# Altium PCB Arbolito.PcbDoc
Units mil, origin at the board's own origin, x right, y up, seen from the top; angles counter-clockwise.
Board outline 6050 x 2250 mil, 2 copper layers (Top Layer, Bottom Layer); 44 components, 53 nets, 146 pads, 20 vias.
Unrouted connection lines stored in the file: 1.
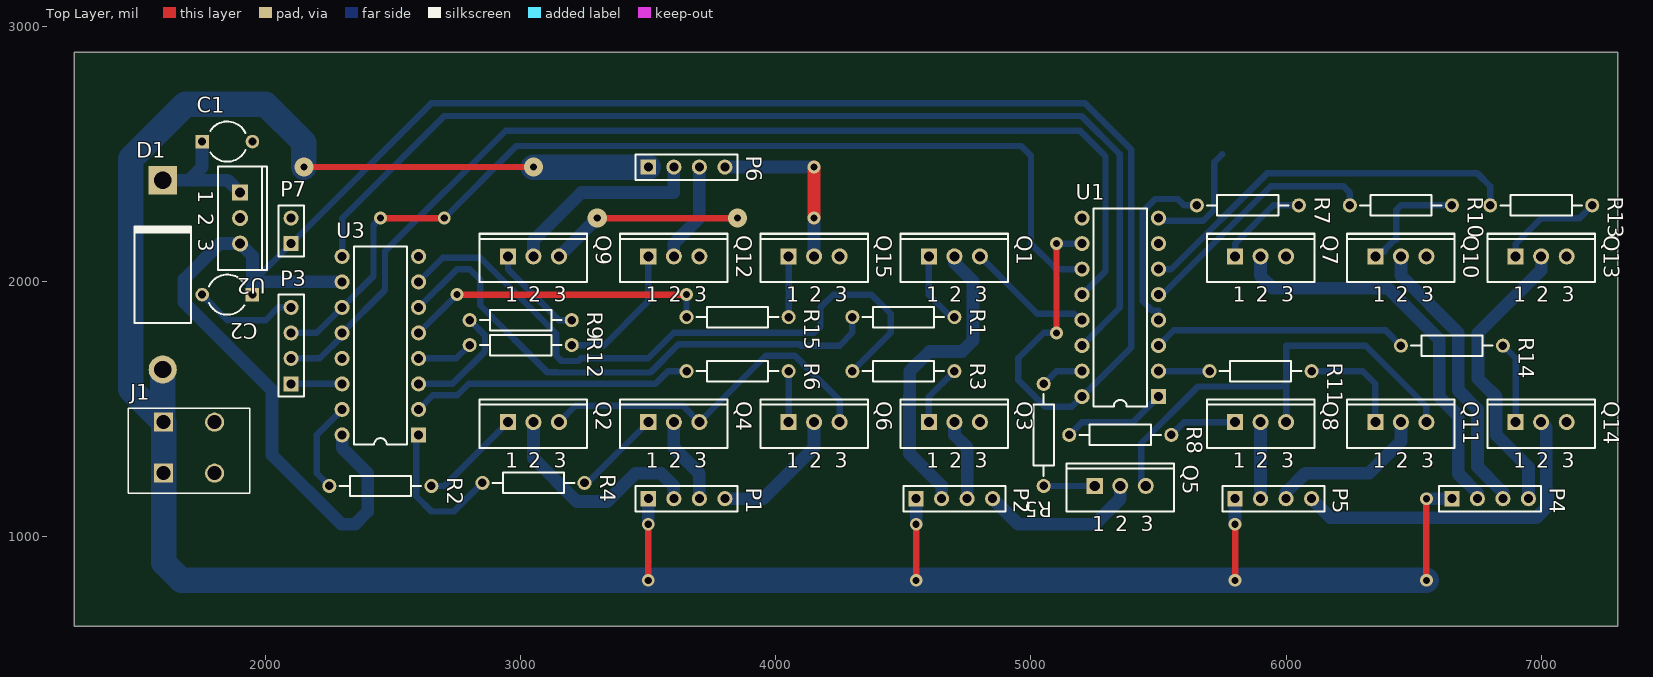
[diagram p0: Top Layer view]
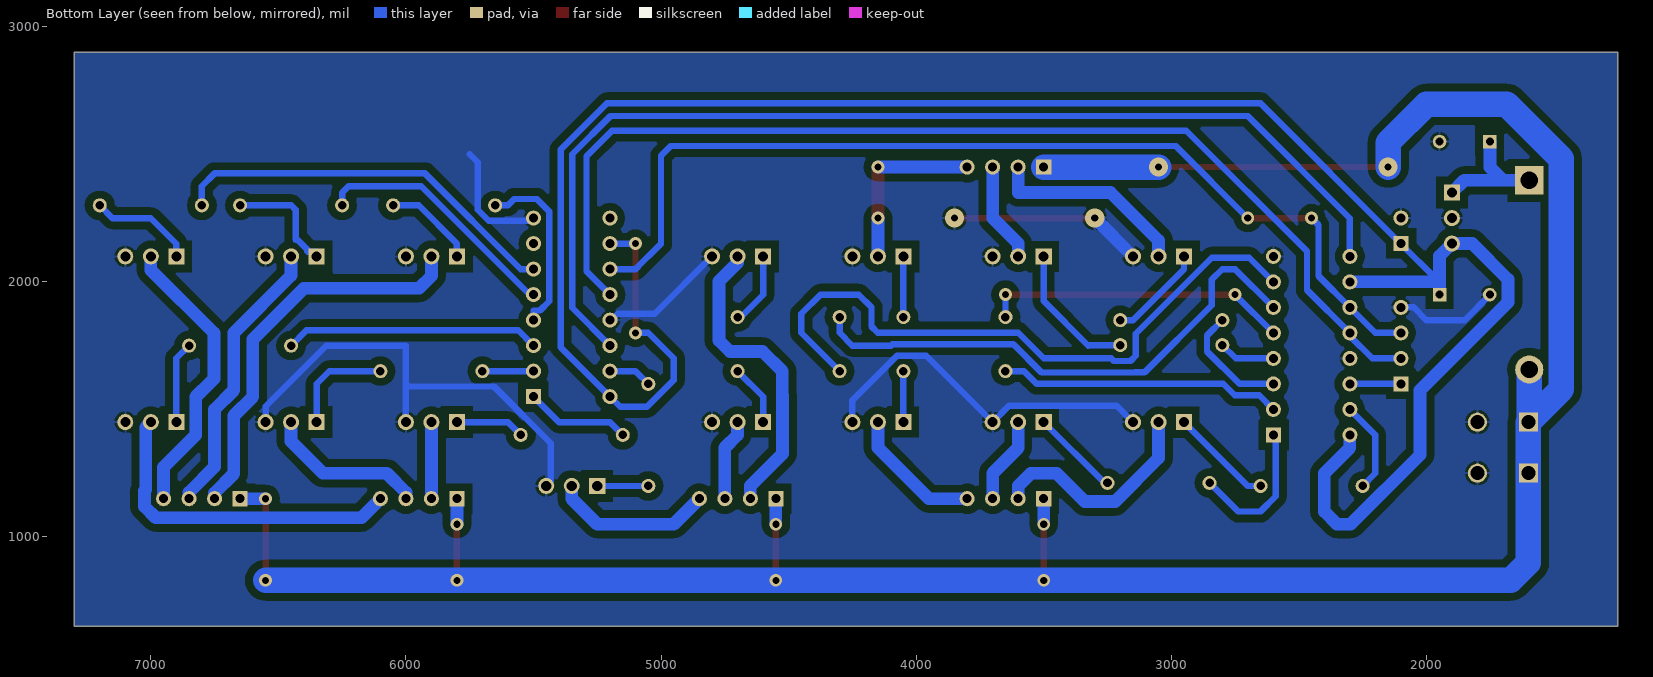
[diagram p1: Bottom Layer view, seen from below]

## Layer stack, top to bottom
Top Solder: solder mask 0.4, Solder Resist, Dk 3.5
Top Layer: signal copper 1.4
Dielectric 1: dielectric 12.6, FR-4, Dk 4.8
Bottom Layer: signal copper 1.4
Bottom Solder: solder mask 0.4, Solder Resist, Dk 3.5

## Board outline
1250,2900 7300,2900 7300,650 1250,650

## Design rules (kind name [scope] priority, off if disabled: settings)
Clearance [All] p1: gap=20 except(30: Arc-Poly Track-Poly SMDPad-Poly THPad-Poly Via-Poly Fill-Poly Poly-Poly)
PolygonConnect [All] p1: connectstyle=Relief reliefconductorwidth=10 reliefentries=4 polygonreliefangle="90 Angle" airgapwidth=10
RoutingVias [All] p1: holewidth=28 width=50 viastyle="Through Hole" minholewidth=28 minwidth=50 maxholewidth=28 maxwidth=50
SolderMaskExpansion [All] p1: expansion=4
Width [All] p1: maxlimit=100 minlimit=25 preferedwidth=50
30 further rules are at their usual default settings.

## Components (designator, comment, footprint, x,y, rotation, side; value= is the part's Value field where it differs from the comment)
C1 "Cap2" CAPR5-4X5 1850,2550 r0 top
C2 "Cap2" CAPR5-4X5 1850,1950 r180 top
D1 "Diode 1N5408" DO-201AD 1596.82,2027.33 r90 top
J1 "691307500002" 691307500002 1700,1350 r0 top
P1 "Tira 1" HDR1X4 3500,1150 r0 top
P2 "Tira 3" HDR1X4 4550,1150 r0 top
P3 "In" HDR1X4 2100,1600 r90 top
P4 "Tira 5" HDR1X4 6650,1150 r0 top
P5 "Tira 4" HDR1X4 5800,1150 r0 top
P6 "Tira 2" HDR1X4 3500,2450 r0 top
P7 "Arduino 5V" HDR1X2 2100,2150 r90 top
Q1 "TIP31" TO-220-AB 4700,2100 r0 top
Q2 "TIP31" TO-220-AB 3050,1450 r0 top
Q3 "TIP31" TO-220-AB 4700,1450 r0 top
Q4 "TIP31" TO-220-AB 3600,1450 r0 top
Q5 "TIP31" TO-220-AB 5350,1200 r0 top
Q6 "TIP31" TO-220-AB 4150,1450 r0 top
Q7 "TIP31" TO-220-AB 5900,2100 r0 top
Q8 "TIP31" TO-220-AB 5900,1450 r0 top
Q9 "TIP31" TO-220-AB 3050,2100 r0 top
Q10 "TIP31" TO-220-AB 6450,2100 r0 top
Q11 "TIP31" TO-220-AB 6450,1450 r0 top
Q12 "TIP31" TO-220-AB 3600,2100 r0 top
Q13 "TIP31" TO-220-AB 7000,2100 r0 top
Q14 "TIP31" TO-220-AB 7000,1450 r0 top
Q15 "TIP31" TO-220-AB 4150,2100 r0 top
R1 "Res2" AXIAL-0.4 4500,1862 r0 top
R2 "Res2" AXIAL-0.4 2450,1200 r0 top
R3 "Res2" AXIAL-0.4 4500,1650 r0 top
R4 "Res2" AXIAL-0.4 3050,1212 r0 top
R5 "Res2" AXIAL-0.4 5050,1400 r270 top
R6 "Res2" AXIAL-0.4 3850,1650 r0 top
R7 "Res2" AXIAL-0.4 5850,2300 r0 top
R8 "Res2" AXIAL-0.4 5350,1400 r0 top
R9 "Res2" AXIAL-0.4 3000,1850 r0 top
R10 "Res2" AXIAL-0.4 6450,2300 r0 top
R11 "Res2" AXIAL-0.4 5900,1650 r0 top
R12 "Res2" AXIAL-0.4 3000,1752.12 r0 top
R13 "Res2" AXIAL-0.4 7000,2300 r0 top
R14 "Res2" AXIAL-0.4 6650,1750 r0 top
R15 "Res2" AXIAL-0.4 3850,1862 r0 top
U1 "SN74HC595N" N016 5350,1900 r90 top
U2 "MC7805ACT" 221A-04 1900,2250 r270 top
U3 "SN74HC595N" N016 2450,1750 r90 top

## Footprints (in the part's own frame and the unit in brackets; to place one, negate y for a bottom-side part, rotate by r counter-clockwise, add the part's x,y. Pads: shape width x height; smd on the part's side, far side on the other; paste and mask are expansions set on the pad)
221A-04 [mm] "TO, Thru-Hole, Vertical, Heatsink Mounted; 3 In-Line Leads; Pitch 2.54 mm"
  rect 1.6x1.6 hole 1: 1(-2.54,0)
  round 1.6 hole 1: 2(0,0) 3(2.54,0)
  silkscreen extent -5.15,-2.2 5.15,2.7
691307500002 [mm] "5.08 mm Reversed Gender Vertical PCB Header - 02p"
  rect 1.9x1.9 hole 1.4: 1(-2.54,-2.54) 1(-2.54,2.54)
  round 1.9 hole 1.4: 2(2.54,-2.54) 2(2.54,2.54)
  silkscreen extent -6.04,-4.56 6.04,3.94, body extent -6.04,-6.85 6.04,3.94, height 19.01
AXIAL-0.4 [mm] "Axial Device, Thru-Hole; 2 Leads; 0.4 in Pin Spacing"
  round 1.4 hole 0.85: 1(-5.08,0) 2(5.08,0)
  silkscreen extent -4.06,-1.02 4.06,1.02
CAPR5-4X5 [mm] "Capacitor; 2 Leads"
  rect 1.35x1.35 hole 0.8: 1(-2.5,0)
  round 1.35 hole 0.8: 2(2.5,0)
  silkscreen extent -1.69,-2 1.82,2
DO-201AD [mm] "Diode, Axial; Body 9.5 x 5.6 mm (LxDia. max), Lead Dia. 1.32 mm (max)"
  round 2.8 hole 1.7: 1(-9.42,0)
  rect 2.8x2.8 hole 1.7: 2(9.42,0)
  silkscreen extent -4.8,-2.8 4.9,2.8
HDR1X2 [mm] "Connector; Header; 2 Position"
  rect 1.5x1.5 hole 0.9: 1(0,0)
  round 1.5 hole 0.9: 2(2.54,0)
  silkscreen extent -1.27,-1.27 3.81,1.27
HDR1X4 [mm] "Connector; Header; 4 Position"
  rect 1.5x1.5 hole 0.9: 1(0,0)
  round 1.5 hole 0.9: 2(2.54,0) 3(5.08,0) 4(7.62,0)
  silkscreen extent -1.27,-1.27 8.89,1.27
N016 [mm] "DIP; 16 Leads; Row Spacing 7.62 mm; Pitch 2.54 mm"
  rect 1.5x1.5 hole 0.9: 1(-8.89,-3.81)
  round 1.5 hole 0.9: 2(-6.35,-3.81) 3(-3.81,-3.81) 4(-1.27,-3.81) 5(1.27,-3.81) 6(3.81,-3.81) 7(6.35,-3.81) 8(8.89,-3.81) 9(8.89,3.81) 10(6.35,3.81) 11(3.81,3.81) 12(1.27,3.81) 13(-1.27,3.81) 14(-3.81,3.81) 15(-6.35,3.81) 16(-8.89,3.81)
  silkscreen extent -9.85,-2.65 9.85,2.65
TO-220-AB [mm] "TO, Thru-Hole, Vertical, Heatsink Mounted; 3 In-Line Leads; Pitch 2.54 mm"
  rect 1.6x1.6 hole 1: 1(-2.54,0)
  round 1.6 hole 1: 2(0,0) 3(2.54,0)
  silkscreen extent -5.35,-2.55 5.35,2.25

## Part data
C1 C2: "Capacitor"
D1: "3 Amp Medium Power Silicon Rectifier Diode"
J1: "WR-TBL Terminal block - serie 3075"
P1 P2 P3 P4 P5 P6: library part "Header 4", "Header, 4-Pin"
P7: library part "Header 2", "Header, 2-Pin"
Q1 Q2 Q3 Q4 Q5 Q6 Q7 Q8 Q9 Q10 Q11 Q12 Q13 Q14 Q15: library part 2N3904, "NPN General Purpose Amplifier"
R1 R2 R3 R4 R5 R6 R7 R8 R9 R10 R11 R12 R13 R14 R15: "Resistor"
U1 U3: "8-Bit Shift Register with 3-State Output Registers"
U2: "3-Terminal Positive Fixed Voltage Regulator"

## Via types
v1: diameter 50, hole 28, Top Layer to Bottom Layer, 16 vias
v2: diameter 75, hole 28, Top Layer to Bottom Layer, 4 vias

## Nets (pads, with @x,y where several pads share a name; then routed paths per layer and width w, separated by ;. In a path a pad name is that pad's centre, name@x,y a point inside that pad or via, vN(x,y) a via of type N, cw(c..) or ccw(c..) an arc to the next point about the centre after c; other vN are vias at no path point)
5V: C2.1 P7.1 U1.10 U1.16 U2.3 U3.10 U3.16 | length 8416.6
  Top Layer w25: v1(5100,1800) v1(5100,2150)
  Bottom Layer w25: 1962.11,2012.11 P7.1 2650,2700 5211.61,2700 5392.97,2518.64 5392.97,1742.97 U1.16 5160.06,1510.06 5055,1510.06 4950,1615.06 4950,1700 5050,1800 v1(5100,1800) ; v1(5100,2150) U1.10
  Bottom Layer w50: C2.1 1948.43,2025.79 ; U3.16 2300,1350 2400,1250 2400,1100 2350,1050 2297.39,1050 2025.47,1321.91 2025.47,1574.88 1680,1920.35 1680,2009.9 1820.1,2150 U2.3 1948.43,2101.57 1948.43,2025.79 ; U3.10 1974.21,2000 1948.43,2025.79
12V: D1.1 J1.1 P1.1 P2.1 P4.1 P5.1 P6.1 | length 10472.7
  Top Layer w25: v2(2150,2450) v2(3050,2450) ; v1(3500,830) v1(3500,1050) ; v1(4550,830) v1(4550,1050) ; v1(5800,830) v1(5800,1050) ; v1(6550,830) v1(6550,1150)
  Bottom Layer w50: v1(3500,1050) P1.1 ; v1(4550,1050) P2.1 ; v1(5800,1050) P5.1 ; v1(6550,1150) P4.1
  Bottom Layer w100: D1.1 J1.1@1596.82,1453.18 ; v2(2150,2450) 2150,2545.98 2000,2695.98 1685.38,2695.98 1471.7,2482.31 1471.7,1578.3 J1.1@1596.82,1453.18 ; v2(3050,2450) P6.1 ; v1(6550,830) v1(5800,830) v1(4550,830) v1(3500,830) 1670,830 1600,900 1600,1250 1600,1450 J1.1@1596.82,1453.18
CLK: P3.3 U1.11 U3.11 | length 3922.1
  Top Layer w25: v1(2450,2250) v1(2700,2250)
  Bottom Layer w25: P3.3 2200,1800 U3.11 2422.97,2022.97 2422.97,2222.97 v1(2450,2250) ; v1(2700,2250) 2982.5,2532.5 4961.83,2532.5 5000,2494.33 5000,2150 5025,2125 5075,2075 5100,2050 U1.11
DATA: P3.1 U3.14 | length 200
  Bottom Layer w25: P3.1 U3.14
GND: C1.2 C2.2 J1.2 P3.4 P7.2 Q1.3 Q2.3 Q3.3 Q4.3 Q5.3 Q6.3 Q7.3 Q8.3 Q9.3 Q10.3 Q11.3 Q12.3 Q13.3 Q14.3 Q15.3 U1.8 U1.13 U2.2 U3.8 U3.13 | length 5415.9
  Top Layer w25: v2(3300,2250) v2(3850,2250)
  Bottom Layer w25: C2.2 1751.57,1948.43 1850,1850 2000,1850 2050,1900 P3.4 ; Q2.3 3214,1514 3636,1514 Q4.3 3960.06,1710.06 4074.88,1710.06 4250,1534.94 Q6.3 ; Q1.3 5024.53,1875.47 5170,1875.47 5170,1874.6 5194.6,1850 U1.13 ; Q5.3 5431.82,1218.18 5431.82,1366.76 5655,1589.94 5989.94,1589.94 6000,1600 ; U1.8 5510.06,2239.94 5674.88,2239.94 5718.18,2283.24 5718.18,2468.18 5750,2500 ; Q8.3 6000,1600 ; Q11.3 6550,1512.22 6312.22,1750 6000,1750 6000,1600
  Bottom Layer w50: Q9.3 v2(3300,2250)
LATCH: P3.2 U1.12 U3.12 | length 4279.3
  Bottom Layer w25: P3.2 2212.28,1700 2300,1787.72 U3.12 2467.97,1967.97 2467.97,2119.33 2940.81,2592.17 5192.17,2592.17 5292.17,2492.17 5292.17,2042.17 U1.12
NetC1_1: C1.1 D1.2 U2.1 | length 496.1
  Bottom Layer w50: D1.2 1700,2398.19 ; C1.1@1751.1,2550 1751.1,2449.29 1700,2398.19 ; U2.1 1851.81,2398.19 1700,2398.19
NetP1_2: P1.2 Q2.2 | length 877.5
  Bottom Layer w50: Q2.2 3050,1309.38 3219.95,1139.44 3339.44,1139.44 3450,1250 3550,1250 3600,1200 P1.2
NetP1_3: P1.3 Q4.2 | length 350.4
  Bottom Layer w25: Q4.2@3600,1441.05 Q4.2
  Bottom Layer w50: Q4.2 3600,1350 3700,1250 P1.3
NetP1_4: P1.4 Q6.2 | length 532.8
  Bottom Layer w50: P1.4 3950,1150 4150,1350 Q6.2
NetP2_2: P2.2 Q1.2 | length 1210.4
  Bottom Layer w50: P2.2 4650,1200 4523.5,1326.5 4523.5,1554.82 4525,1556.32 4525,1650 4602.44,1727.44 4730.05,1727.44 4772.56,1769.95 4772.56,2002.44 4700,2075 Q1.2
NetP2_3: P2.3 Q3.2 | length 320.7
  Bottom Layer w50: Q3.2 4700,1400 4750,1350 P2.3
NetP2_4: P2.4 Q5.2 | length 632.8
  Bottom Layer w50: P2.4 4950,1050 5250,1050 5350,1150 Q5.2
NetP4_2: P4.2 Q7.2 | length 1566.6
  Bottom Layer w50: Q7.2 5900,2023.5 5948.5,1975 6400,1975 6600,1775 6600,1550 6675,1475 6675,1247.69 6750,1172.69 P4.2
NetP4_3: P4.3 Q10.2 | length 1115.7
  Bottom Layer w50: Q10.2 6450,2025 6675,1800 6675,1575 6750,1500 6750,1275 6850,1175 P4.3
NetP4_4: P4.4 Q13.2 | length 1135
  Bottom Layer w50: P4.4 6950,1273.37 6823.5,1399.86 6823.5,1550 6796.06,1577.44 6794.95,1577.44 6752.44,1619.95 6752.44,1799.45 7000,2047.01 Q13.2
NetP5_2: P5.2 Q8.2 | length 300
  Bottom Layer w50: P5.2 Q8.2
NetP5_3: P5.3 Q11.2 | length 632.8
  Bottom Layer w50: P5.3 6000,1175 6075,1250 6325,1250 6450,1375 Q11.2
NetP5_4: P5.4 Q14.2 | length 1314.5
  Bottom Layer w50: P5.4 6174.53,1075.47 6980.87,1075.47 7024.53,1119.13 7024.53,1180.87 7020,1185.4 7020,1430 Q14.2
NetP6_2: P6.2 Q9.2 | length 790
  Bottom Layer w50: Q9.2 3050,2162.22 3237.78,2350 3600,2350 P6.2
NetP6_3: P6.3 Q12.2 | length 391.4
  Bottom Layer w50: Q12.2 3600,2150 3700,2250 P6.3
NetP6_4: P6.4 Q15.2 | length 700
  Top Layer w50: v1(4150,2250) v1(4150,2450)
  Bottom Layer w50: P6.4 v1(4150,2450) ; Q15.2 v1(4150,2250)
NetQ1_2: Q1.1 R1.2 | length 282.9
  Bottom Layer w25: Q1.1 4600,1950 R1.2@4694,1856
NetQ2_2: Q2.1 R2.2 | length 403.6
  Bottom Layer w25: R2.2 2700,1200 Q2.1
NetQ3_2: Q3.1 R3.2 | length 241.4
  Bottom Layer w25: Q3.1 4600,1550 R3.2
NetQ4_2: Q4.1 R4.2 | length 348.6
  Bottom Layer w25: R4.2 3262,1212 Q4.1
NetQ5_2: Q5.1 R5.2 | length 200
  Bottom Layer w25: R5.2 Q5.1
NetQ6_2: Q6.1 R6.2 | length 200
  Bottom Layer w25: Q6.1 4050,1550 R6.2
NetQ7_2: Q7.1 R7.2 | length 362.1
  Bottom Layer w25: Q7.1 5800,2150 5950,2300 R7.2
NetQ8_2: Q8.1 R8.2 | length 270.7
  Bottom Layer w25: R8.2 5600,1450 Q8.1
NetQ9_2: Q9.1 R9.2 | length 382.8
  Bottom Layer w25: Q9.1 2950,2050 3150,1850 R9.2
NetQ10_2: Q10.1 R10.2 | length 465.6
  Bottom Layer w25: Q10.1 6350,2117.5 6384.17,2117.5 6386,2119.33 6386,2126.51 6423.49,2164 6430.67,2164 6432.5,2165.83 6432.5,2282.5 6450,2300 R10.2
NetQ11_2: Q11.1 R11.2 | length 420.7
  Bottom Layer w25: R11.2 6300,1650 6350,1600 Q11.1
NetQ12_2: Q12.1 R12.2 | length 548.4
  Bottom Layer w25: R12.2 3322.88,1752.12 3325,1750 3500,1925 Q12.1
NetQ13_2: Q13.1 R13.2 | length 412.1
  Bottom Layer w25: Q13.1 6900,2150 7000,2250 7150,2250 R13.2
NetQ14_2: Q14.1 R14.2 | length 320.7
  Bottom Layer w25: R14.2 6900,1700 Q14.1
NetQ15_2: Q15.1 R15.2 | length 238
  Bottom Layer w25: R15.2 Q15.1
NetR1_1: R1.1 U3.6 | length 2131.9
  Bottom Layer w25: U3.6 2750,2050 2800,2050 2841,2009 2841,1909 3105,1645 3141.36,1645 3141.42,1644.94 3508.58,1644.94 3618.7,1755.06 4093.52,1755.06 4098.58,1750 4250,1750 4300,1800 R1.1@4300,1875
NetR2_1: R2.1 U3.15 | length 362.1
  Bottom Layer w25: R2.1 2200,1250 2200,1400 U3.15
NetR3_1: R3.1 U3.7 | length 2577.6
  Bottom Layer w25: U3.7 2695,2095 2841.36,2095 3139.94,1796.42 3139.94,1710.06 3160.06,1689.94 3224.88,1689.94 3234.94,1700 3500,1700 3600.06,1800.06 4112.16,1800.06 4112.22,1800 4150,1800 4175,1825 4175,1900 4225,1950 4375,1950 4450,1875 4450,1800 R3.1
NetR4_1: R4.1 U3.1 | length 575.4
  Bottom Layer w25: U3.1 2589.94,1389.94 2589.94,1160.06 2650,1100 2738,1100 R4.1
NetR5_1: R5.1 U1.15 | length 170.7
  Bottom Layer w25: R5.1 5100,1650 U1.15
NetR6_1: R6.1 U3.2 | length 1112.2
  Bottom Layer w25: U3.2 2655,1555 2751.46,1555 2796.46,1600 3122.72,1600 3122.78,1599.94 3527.34,1599.94 3577.4,1650 R6.1
NetR7_1: R7.1 U1.4 | length 709.2
  Bottom Layer w25: U1.4 5500,1887.97 5474.31,1887.97 5437.97,1924.31 5437.97,2275.69 5487.28,2325 5575,2325 5600,2300 R7.1
NetR8_1: R8.1 U1.1 | length 412.1
  Bottom Layer w25: R8.1 5200,1450 5400,1450 U1.1
NetR9_1: R9.1 U3.3 | length 460.4
  Bottom Layer w25: U3.3 2732.82,1600 2860.06,1727.24 2860.06,1789.94 R9.1
NetR10_1: R10.1 U1.5 | length 986.4
  Bottom Layer w25: U1.5 5515.06,1950 5940.06,2375 6225,2375 6250,2350 R10.1
NetR11_1: R11.1 U1.2 | length 200
  Bottom Layer w25: U1.2 R11.1
NetR12_1: R12.1 U3.4 | length 221.6
  Bottom Layer w25: U3.4 2747.88,1700 R12.1
NetR13_1: R13.1 U1.6 | length 1551
  Bottom Layer w25: U1.6 5550,2050 5925,2425 6750,2425 6800,2375 R13.1
NetR14_1: R14.1 U1.3 | length 1014
  Bottom Layer w25: U1.3@5510.06,1739.94 U1.3 5560.06,1810.06 6389.94,1810.06 R14.1
NetR15_1: R15.1 U3.5 | length 1200.1
  Top Layer w25: v1(2750,1950) v1(3650,1950)
  Bottom Layer w25: U3.5 v1(2750,1950) ; R15.1 v1(3650,1950)
NetU1_14: U1.14 U3.9 | length 4237.1
  Bottom Layer w25: U3.9 2300,2250 2700,2650 5197.97,2650 5347.97,2500 5347.97,1897.97 U1.14
pads on no net: U1.7 U1.9

## Polygon pours and split planes (outlines as drawn)
GND on Bottom Layer "GND plane" (solid, pour order 2): 1250,2900 7300,2900 7300,650 1250,650

## Text inside footprints (layer, text, board x,y; h text height)
Q1: Top Overlay "3" at 4780.31,1921.85 h59.06; Top Overlay "2" at 4680.31,1921.85 h59.06; Top Overlay "1" at 4590.16,1921.85 h59.06
Q2: Top Overlay "3" at 3130.32,1271.85 h59.06; Top Overlay "2" at 3030.32,1271.85 h59.06; Top Overlay "1" at 2940.16,1271.85 h59.06
Q3: Top Overlay "3" at 4780.31,1271.85 h59.06; Top Overlay "2" at 4680.31,1271.85 h59.06; Top Overlay "1" at 4590.16,1271.85 h59.06
Q4: Top Overlay "3" at 3680.32,1271.85 h59.06; Top Overlay "2" at 3580.32,1271.85 h59.06; Top Overlay "1" at 3490.16,1271.85 h59.06
Q5: Top Overlay "3" at 5430.31,1021.85 h59.06; Top Overlay "2" at 5330.31,1021.85 h59.06; Top Overlay "1" at 5240.16,1021.85 h59.06
Q6: Top Overlay "3" at 4230.31,1271.85 h59.06; Top Overlay "2" at 4130.31,1271.85 h59.06; Top Overlay "1" at 4040.16,1271.85 h59.06
Q7: Top Overlay "3" at 5980.31,1921.85 h59.06; Top Overlay "2" at 5880.31,1921.85 h59.06; Top Overlay "1" at 5790.16,1921.85 h59.06
Q8: Top Overlay "3" at 5980.31,1271.85 h59.06; Top Overlay "2" at 5880.31,1271.85 h59.06; Top Overlay "1" at 5790.16,1271.85 h59.06
Q9: Top Overlay "3" at 3130.32,1921.85 h59.06; Top Overlay "2" at 3030.32,1921.85 h59.06; Top Overlay "1" at 2940.16,1921.85 h59.06
Q10: Top Overlay "3" at 6530.31,1921.85 h59.06; Top Overlay "2" at 6430.31,1921.85 h59.06; Top Overlay "1" at 6340.16,1921.85 h59.06
Q11: Top Overlay "3" at 6530.31,1271.85 h59.06; Top Overlay "2" at 6430.31,1271.85 h59.06; Top Overlay "1" at 6340.16,1271.85 h59.06
Q12: Top Overlay "3" at 3680.32,1921.85 h59.06; Top Overlay "2" at 3580.32,1921.85 h59.06; Top Overlay "1" at 3490.16,1921.85 h59.06
Q13: Top Overlay "3" at 7080.31,1921.85 h59.06; Top Overlay "2" at 6980.31,1921.85 h59.06; Top Overlay "1" at 6890.16,1921.85 h59.06
Q14: Top Overlay "3" at 7080.31,1271.85 h59.06; Top Overlay "2" at 6980.31,1271.85 h59.06; Top Overlay "1" at 6890.16,1271.85 h59.06
Q15: Top Overlay "3" at 4230.31,1921.85 h59.06; Top Overlay "2" at 4130.31,1921.85 h59.06; Top Overlay "1" at 4040.16,1921.85 h59.06
U2: Top Overlay "3" at 1735.63,2169.68 h59.06 r270; Top Overlay "2" at 1735.63,2269.68 h59.06 r270; Top Overlay "1" at 1735.63,2359.84 h59.06 r270